# Altium PCB Arduino_FPGA_Shield.PcbDoc (part 2 of 2)
Units mm, origin at the board's own origin, x right, y up, seen from the top; angles counter-clockwise.
Board outline 68.58 x 53.34 mm, 4 copper layers (Top, PWR, GND, Bottom), stack 2.023 mm thick; 82 components, 141 nets, 474 pads, 191 vias.
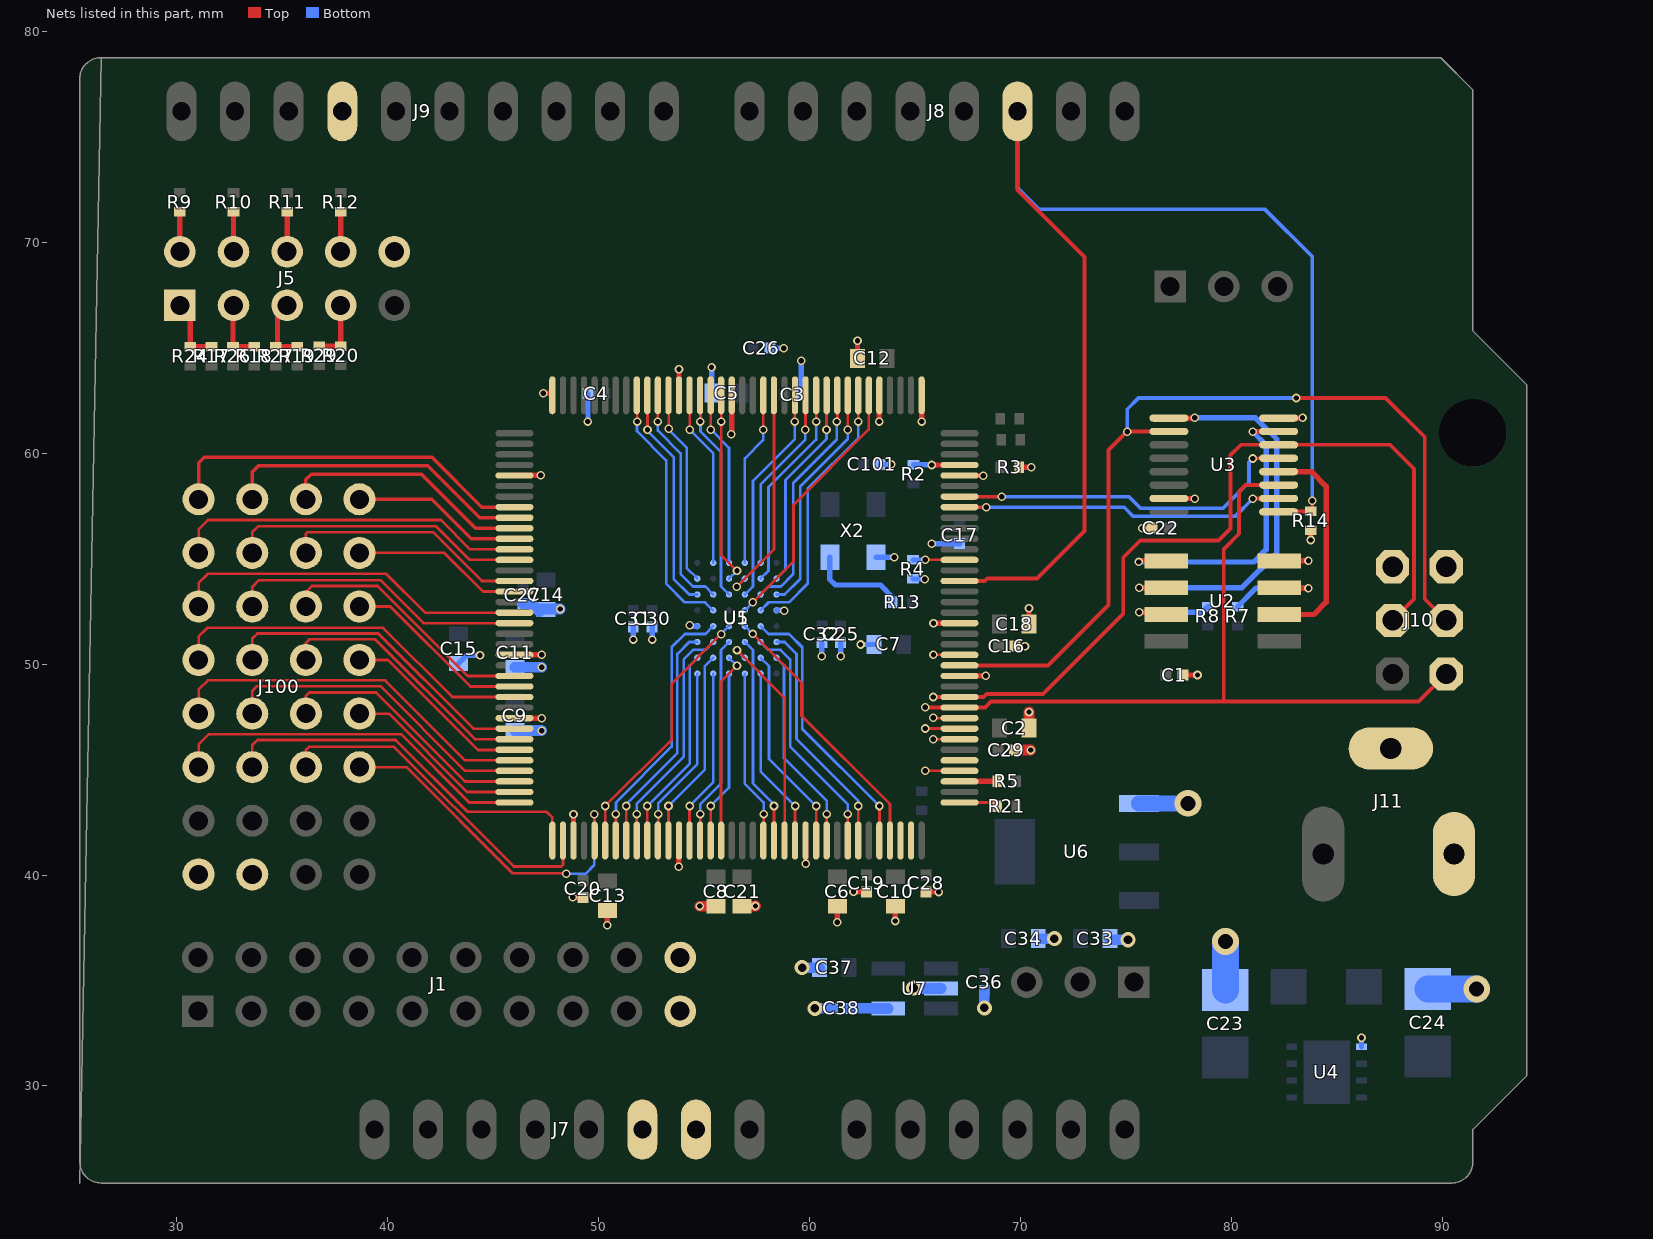
[diagram p4: the nets of this part, all layers, seen from the top]

## Via types
v1: diameter 0.406, hole 0.254, Top to Bottom, 170 vias
v2: diameter 0.405, hole 0.254, Top to Bottom, 8 vias
v3: diameter 0.711, hole 0.406, Top to Bottom, 6 vias
v4: diameter 0.5, hole 0.254, Top to Bottom, 4 vias
v5: diameter 1.27, hole 0.711, Top to Bottom, 3 vias

## Nets (pads, with @x,y where several pads share a name; then routed paths per layer and width w, separated by ;. In a path a pad name is that pad's centre, name@x,y a point inside that pad or via, vN(x,y) a via of type N, cw(c..) or ccw(c..) an arc to the next point about the centre after c; other vN are vias at no path point) (continued)
GND: C1.2 C2.2 C3.1 C4.1 C5.2 C6.2 C7.2 C8.2 C9.2 C10.2 C11.2 C12.2 C13.2 C14.1 C15.2 C16.1 C17.1 C18.1 C19.1 C20.1 C21.1 C22.2 C23.2 C24.2 C25.2 C26.2 C27.2 C28.1 C29.1 C30.2 C31.2 C32.2 C33.2 C34.2 C36.1 C37.1 C38.1 C101.2 J1.19 J1.20 J5.10 J7.6 J7.7 J9.7 J10.6 J11.2 J11.3 J100.29 J100.30 R3.1 R4.1 R14.1 U1.3 U1.13 U1.25 U1.49 U1.54 U1.68 U1.73 U1.77 U1.91 U1.96 U1.108 U1.113 U1.130 U1.136 U2.4 U3.8 U3.15 U4.1 U5.D1 U5.E6 U6.1 U7.2 X2.2 | length 64.7
  Top w0.127: U1.96@53.795,62.747 U1.96@53.797,62.745
  Top w0.254: U1.136@45.728,47.437 U1.136@46.005,47.437 v1@47.36,47.437 ; U1.130@46.005,50.437 46.013,50.444 v1(47.295,50.444) ; U1.113@46.013,58.945 v1(47.256,58.945) ; v1(47.371,62.84) 47.702,62.84 U1.108@47.805,62.737 ; v1(48.768,38.938) 48.755,38.938 48.749,38.945 C20.1@49.251,38.945 ; U1.3@48.805,41.637 v1(48.805,42.88) ; C13.2@50.325,38.35 50.4,38.275 v1(50.4,37.625) v1@50.419,37.644 ; v1(53.8,40.394) 53.8,41.642 U1.13@53.805,41.637 ; U1.96@53.805,62.737 v1(53.805,63.98) ; v1(54.788,38.529) v1@54.799,38.518 ; v1(56.286,60.884) 56.308,60.905 U1.91@56.308,62.734 ; U1.91@56.289,62.731 U1.91@56.295,62.726 ; v1(59.808,40.538) U1.25@59.808,41.639 ; v1(61.304,37.756) 61.316,37.767 C6.2@61.316,38.518 ; v1(62.078,39.205) 62.084,39.199 C19.1@62.814,39.199 ; C12.2@62.267,64.491 v1(62.267,65.318) ; v1(63.305,61.494) U1.77@63.305,62.737 ; v1(64.059,37.821) C10.2@64.059,38.518 ; v1(65.305,61.494) U1.73@65.305,62.737 ; C28.1@65.38,39.199 66.11,39.199 v1(66.116,39.192) ; v1@65.456,54 v1(65.456,54.026) ; v1(65.869,51.937) U1.54@67.105,51.937 ; U1.49@67.105,49.437 v1(68.348,49.437) ; U1.68@67.105,58.937 v1@68.224,58.937 ; C16.1@69.742,50.851 v1(70.206,50.851) ; R3.1@69.944,59.334 v1(70.51,59.334) ; C18.1@70.398,51.892 v1(70.398,52.64) ; v1(75.768,56.439) C22.2@76.232,56.439 ; U3.15@77.029,57.848 78.245,57.848 v1(78.257,57.836) ; C1.2@77.692,49.479 v1(78.384,49.479) ; U3.8@82.229,61.658 83.401,61.658 83.388,61.671 v1(83.363,61.671) ; U2.4@82.253,54.889 v1(83.642,54.889) ; v1(83.744,55.88) R14.1@83.744,56.344
  Top w0.508: v1@54.799,38.518 C8.2@55.55,38.518 ; C21.1@56.794,38.518 57.415,38.518 v1(57.429,38.532) ; C29.1@69.717,45.923 v1(70.476,45.923) ; C2.2@70.398,46.965 v1(70.398,47.724)
  Bottom w0.254: C15.2@43.358,50.024 43.753,50.419 v1(44.374,50.419) ; v1(49.479,61.493) 49.492,61.506 C4.1@49.492,62.823 ; v1(51.643,51.16) C31.2@51.643,51.802 ; v1(52.532,51.16) C30.2@52.532,51.802 ; v1(54.32,51.831) 54.355,51.797 U5.D1@54.677,51.797 ; v1(55.35,64.075) 55.358,64.067 C5.2@55.358,62.84 ; C26.2@58.109,64.973 v1(58.776,64.973) ; U5.E6@58.427,52.547 58.786,52.547 58.791,52.542 58.775,52.527 58.775,52.525 v1(58.8,52.525) ; C3.1@59.607,62.763 v1(59.607,64.383) ; v1(60.579,50.368) C32.2@60.579,51.01 ; v1(61.468,50.368) C25.2@61.468,51.01 ; v1(62.413,50.927) C7.2@63.054,50.927 ; X2.2@63.152,55.062 64.003,55.062 v1(64.008,55.067) ; C101.2@63.341,59.461 v1(63.868,59.461) ; R4.1@64.897,54.033 65.449,54.033 v1(65.456,54.026) ; v1@65.786,55.702 65.792,55.709 C17.1@67.107,55.709 ; v1(83.363,61.671) v1@83.388,61.671 ; v1(83.744,55.88) v1@83.795,55.829 ; U4.1@86.156,31.858 v1(86.157,32.283) v1(86.157,32.283) ; C24.2@89.306,34.595 90.678,34.595
  Bottom w0.508: C9.2@46.025,46.849 v1@47.288,46.849 ; C11.2@46.025,49.846 v1@47.295,49.846 ; C27.2@46.406,52.864 46.817,52.864 C14.1@47.198,52.483 ; C14.1@47.198,52.61 v1(48.184,52.61) ; v3(59.639,35.611) C37.1@60.463,35.611 ; v3(60.249,33.68) C38.1@61.093,33.68 ; v3(64.922,34.646) 64.948,34.62 U7.2@66.223,34.62 ; v3(68.275,33.706) C36.1@68.275,34.525 ; C34.2@70.829,36.982 v3(71.603,36.982) ; C33.2@74.233,36.932 v3(75.089,36.932)
  Bottom w0.762: U6.1@75.619,43.397 v5(77.931,43.397)
  Bottom w1.27: C23.2@79.705,34.544 v5(79.705,36.855) ; C24.2@89.306,34.595 v5(91.618,34.595)
  other v1: 47.295,46.842 47.295,47.437 47.295,49.84 65.786,55.709 68.224,58.928
HARD_TCK: J5.1 R17.1 R24.1 | length 3.2
  Top w0.254: J5.1@30.15,67.005 30.632,66.523 R24.1@30.632,65.042 R17.1@31.648,65.042
HARD_TDI: J5.3 R18.1 R26.1 | length 3.2
  Top w0.254: J5.3@32.918,67.132 32.664,66.878 R26.1@32.664,65.042 R18.1@33.68,65.042
HARD_TDO: J5.5 R19.1 R27.1 | length 3.5
  Top w0.254: J5.5@35.23,67.005 34.773,66.548 34.773,65.111 R27.1@34.696,65.035 R19.1@35.712,65.035 ; J5.5@35.281,66.954 J5.5@35.458,67.132
HARD_TMS: J5.7 R20.1 R29.1 | length 3.3
  Top w0.254: R29.1@36.754,65.06 R20.1@37.77,65.06 J5.7@37.77,66.904 ; J5.7@37.77,67.005 J5.7@37.77,66.904 ; J5.7@37.998,67.132 J5.7@37.77,66.904
HOLD_N: R8.1 U2.7 | length 5.6
  Top w0.254: v1(75.616,52.451) 76.802,52.451 U2.7@76.903,52.349 U2.7@75.997,52.349
  Bottom w0.254: v1(75.616,52.451) 78.595,52.451 R8.1@78.867,52.723
INIT_B: R5.1 U1.39 | length 1.8
  Top w0.254: U1.39@67.105,44.437 67.119,44.45 R5.1@68.892,44.45
IO0: J100.1 U1.116 | length 17.8
  Top w0.17: J100.1@31.039,57.81 31.039,59.538 31.301,59.8 42.1,59.8 44.463,57.437 U1.116@46.005,57.437
IO1: J100.2 U1.117 | length 14.9
  Top w0.17: J100.2@33.579,57.81 33.579,59.106 33.873,59.4 41.9,59.4 44.363,56.937 U1.117@46.005,56.937
IO2: J100.3 U1.118 | length 12
  Top w0.17: J100.3@36.119,57.81 36.119,58.744 36.375,59 41.6,59 44.163,56.437 U1.118@46.005,56.437
IO3: J100.4 U1.119 | length 8.1
  Top w0.17: J100.4@38.659,57.81 42.09,57.81 43.963,55.937 U1.119@46.005,55.937
IO4: J100.5 U1.120 | length 16.8
  Top w0.127: J100.5@31.039,55.27 31.039,56.388 31.476,56.825 42.514,56.825 43.903,55.437 U1.120@46.005,55.437
IO5: J100.6 U1.121 | length 14.2
  Top w0.127: J100.6@33.579,55.27 33.579,56.248 33.855,56.525 42.3,56.525 43.888,54.937 U1.121@46.005,54.937
IO6: J100.7 U1.123 | length 11.8
  Top w0.127: J100.7@36.119,55.27 36.119,56.172 36.197,56.25 42.15,56.25 44.463,53.937 U1.123@46.005,53.937
IO7: J100.8 U1.124 | length 8.1
  Top w0.127: J100.8@38.659,55.27 42.68,55.27 44.513,53.437 U1.124@46.005,53.437
IO8: J100.9 U1.126 | length 17
  Top w0.127: J100.9@31.039,52.73 31.039,53.848 31.471,54.28 39.929,54.28 41.772,52.437 U1.126@46.005,52.437
IO9: J100.10 U1.127 | length 14.3
  Top w0.127: J100.10@33.579,52.73 33.579,53.654 33.9,53.975 39.65,53.975 41.688,51.937 U1.127@46.005,51.937
IO10: J100.11 U1.132 | length 12.5
  Top w0.127: J100.11@36.119,52.73 36.119,53.416 36.403,53.7 39.525,53.7 43.788,49.437 U1.132@46.005,49.437
IO11: J100.12 U1.133 | length 8.9
  Top w0.127: J100.12@38.659,52.73 40.12,52.73 43.913,48.937 U1.133@46.005,48.937
IO12: J100.13 U1.134 | length 17.6
  Top w0.127: J100.13@31.039,50.19 31.039,51.308 31.445,51.714 39.786,51.714 43.063,48.437 U1.134@46.005,48.437
IO13: J100.14 U1.137 | length 15.4
  Top w0.127: J100.14@33.579,50.19 33.579,51.206 33.822,51.45 39.55,51.45 44.063,46.937 U1.137@46.005,46.937
IO14: J100.15 U1.138 | length 12.7
  Top w0.127: J100.15@36.119,50.19 36.119,51.003 36.291,51.175 39.4,51.175 44.138,46.437 U1.138@46.005,46.437
IO15: J100.16 U1.139 | length 9.3
  Top w0.127: J100.16@38.659,50.19 40.01,50.19 44.277,45.923 45.992,45.923 U1.139@46.005,45.937 U1.139@45.778,45.937
IO16: J100.17 U1.140 | length 17.9
  Top w0.127: J100.17@31.039,47.65 31.039,48.793 31.47,49.225 39.875,49.225 43.663,45.437 U1.140@46.005,45.437
IO17: J100.18 U1.141 | length 15.3
  Top w0.127: J100.18@33.579,47.65 33.579,48.73 33.799,48.95 39.65,48.95 43.663,44.937 U1.141@46.005,44.937
IO18: J100.19 U1.142 | length 12.5
  Top w0.127: J100.19@36.119,47.65 36.119,48.489 36.28,48.65 39.45,48.65 43.663,44.437 U1.142@46.005,44.437
IO19: J100.20 U1.143 | length 8.9
  Top w0.127: J100.20@38.659,47.65 40.05,47.65 43.763,43.937 U1.143@46.005,43.937
IO20: J100.21 U1.144 | length 17.6
  Top w0.127: J100.21@31.039,45.11 31.039,46.177 31.537,46.675 40.625,46.675 43.863,43.437 U1.144@46.005,43.437
IO21: J100.22 U1.1 | length 18
  Top w0.127: J100.22@33.579,45.11 33.579,46.152 33.827,46.4 40.375,46.4 43.776,42.999 47.527,42.999 47.805,42.72 U1.1@47.805,41.637
IO22: J100.23 U1.2 | length 16.6
  Top w0.127: J100.23@36.119,45.11 36.119,45.923 36.271,46.075 40.3,46.075 45.975,40.4 48.223,40.4 48.305,40.482 U1.2@48.305,41.637
IO23: J100.24 U1.5 | length 17
  Top w0.127: J100.24@38.659,45.11 40.89,45.11 45.916,40.084 48.435,40.084 v1(48.463,40.056) ; v1(49.784,42.875) 49.784,41.658 U1.5@49.805,41.637
  Bottom w0.127: v1(48.463,40.056) 49.378,40.056 49.784,40.462 v1(49.784,42.875)
IO24: U1.45 | length 1.2
  Top w0.127: v1@65.852,47.426 U1.45@67.095,47.426
  other v1: 65.862,47.453
IO25: U1.44 | length 1.6
  Top w0.127: v1(65.481,46.945) U1.44@67.113,46.945
IO26: U1.43 | length 1.2
  Top w0.127: v1(65.862,46.437) U1.43@67.105,46.437
IO27: U1.41
IO28: U1.40 | length 1.6
  Top w0.127: v1(65.473,44.937) U1.40@67.105,44.937
IO29: U1.34
IO30: U1.35
M0: R2.1 U1.69 | length 2.2
  Top w0.254: v1(65.786,59.436) U1.69@67.105,59.437
  Bottom w0.254: R2.1@64.922,59.454 65.768,59.454 v1(65.786,59.436)
M1: R4.2 U1.60 | length 2.2
  Top w0.127: v1(65.473,54.937) U1.60@67.105,54.937
  Bottom w0.254: R4.2@64.897,54.933 65.47,54.933 v1(65.473,54.937)
MISO_ARD: J10.1 U1.46 U3.3 | length 37.6
  Top w0.178: v1(65.481,47.945) U1.46@67.113,47.945 ; U1.46@67.105,47.937 68.309,47.937 68.597,48.225 88.865,48.225 J10.1@90.17,49.53 ; 79.633,48.25 79.633,55.458 80.35,56.175 80.35,58.176 80.658,58.483 U3.3@82.229,58.483
MISO_FL: U2.2 U3.4 | length 10.5
  Top w0.254: U3.4@82.229,59.118 83.782,59.118 84.48,58.42 84.48,52.934 83.896,52.349 U2.2@82.253,52.349
MISO_FPGA: U1.65 U3.2 | length 15.7
  Top w0.17: U1.65@67.105,57.437 v1(68.366,57.437) ; v1(81.001,57.836) 80.988,57.848 U3.2@82.229,57.848
  Bottom w0.17: v1(68.366,57.437) 68.378,57.425 74.909,57.425 75.336,56.998 80.162,56.998 v1(81.001,57.836)
MOSI_ARD: J10.4 U1.47 U3.6 | length 40
  Top w0.178: v1(65.862,48.437) U1.47@67.105,48.437 68.25,48.437 68.388,48.575 71.056,48.575 74.857,52.375 ; 74.867,52.375 74.867,55.054 75.667,55.855 79.38,55.855 79.95,56.425 79.95,59.909 80.429,60.389 U3.6@82.229,60.389 87.516,60.389 88.646,59.258 88.646,53.086 J10.4@87.63,52.07 J10.4@87.249,51.689
MOSI_FL: U2.5 U3.7 | length 14.7
  Top w0.254: v1(75.59,54.839) 75.641,54.889 U2.5@76.903,54.889 ; v1@80.988,61.023 U3.7@82.229,61.023
  Bottom w0.254: v1(75.59,54.839) 81.051,54.839 81.636,55.423 81.636,60.376 v1(81.001,61.011)
MOSI_FPGA: U1.66 U3.5 | length 16.9
  Top w0.17: U1.66@67.105,57.937 v1(69.109,57.937) ; v1@80.988,59.753 U3.5@82.229,59.753
  Bottom w0.17: v1(69.109,57.937) 75.138,57.937 75.7,57.375 79.575,57.375 80.823,58.623 80.823,59.563 v1(81.001,59.741)
MUX_SEL: J8.3 R14.2 U1.58 U3.1 | length 60.8
  Top w0.178: U1.58@67.105,53.937 68.299,53.937 68.418,54.056 70.781,54.056 73.025,56.3 73.025,69.3 69.85,72.475 J8.3@69.85,76.2 ; U3.1@82.229,57.213 82.242,57.226 R14.2@83.795,57.226 ; R14.2@83.744,57.244 83.776,57.244 83.82,57.288 v1(83.82,57.734)
  Bottom w0.178: J8.3@69.85,76.2 69.85,72.568 70.866,71.552 81.585,71.552 83.82,69.317 v1(83.82,57.734)
NetC38_2: C38.2 U7.4 | length 2.5
  Bottom w0.508: 62.535,33.68 C38.2@61.893,33.68 63.094,33.68 63.083,33.67 U7.4@63.723,33.67
NetR13_2: R13.2 X2.3 | length 4.6
  Bottom w0.254: X2.3@60.952,55.062 60.952,54.008 61.214,53.746 63.348,53.746 63.939,53.155 R13.2@63.939,52.934
PROGRAM_B: R21.1 U1.37 | length 1.8
  Top w0.127: U1.37@67.105,43.437 R21.1@68.892,43.437 ; R21.1@68.809,43.365 R21.1@68.818,43.355
REF_CLK: U1.51 | length 1.6
  Top w0.127: v1(65.867,50.437) U1.51@67.105,50.437 U1.51@67.113,50.444 ; U1.51@66.726,50.394 U1.51@67.105,50.394
RESET_ARD: J10.5
SCLK_ARD: J10.3 U1.50 U3.10 | length 44.1
  Top w0.178: U1.50@67.105,49.937 71.3,49.937 74.168,52.805 74.168,60.147 v1@75.044,61.023 ; v1@75.057,61.023 U3.10@77.029,61.023 ; v1(83.058,62.611) 87.3,62.611 89.154,60.757 89.154,53.086 J10.3@90.17,52.07
  Bottom w0.178: v1(75.057,61.011) 75.057,62.078 75.59,62.611 v1(83.058,62.611)
SCLK_FL: U2.6 U3.9 | length 19.4
  Top w0.254: v1(75.616,53.619) U2.6@76.903,53.619 ; U3.9@77.029,61.658 v1@78.27,61.658
  Bottom w0.254: v1(75.616,53.619) 80.494,53.619 82.144,55.269 82.144,60.655 81.128,61.671 v1(78.257,61.671)
SOFT_TCK: J5.2 R9.1 | length 1.9
  Top w0.254: J5.2@30.15,69.545 R9.1@30.15,71.432
SOFT_TDI: J5.4 R10.1 | length 1.9
  Top w0.254: J5.4@32.69,69.545 R10.1@32.69,71.432
SOFT_TDO: J5.6 R11.1 | length 1.9
  Top w0.254: J5.6@35.23,69.545 R11.1@35.23,71.432
SOFT_TMS: J5.8 R12.1 | length 1.9
  Top w0.254: J5.8@37.77,69.545 R12.1@37.77,71.432
SRAM0_A0: U1.16 U5.A3 | length 8.3
  Top w0.127: U1.16@55.305,41.637 55.308,41.639 v1(55.308,43.271)
  Bottom w0.127: v1(55.308,43.271) 56.177,44.141 U5.A3@56.177,49.547
SRAM0_A1: U1.21 U5.A4 | length 8.3
  Top w0.127: U1.21@57.805,41.637 57.816,41.647 v1(57.816,42.89)
  Bottom w0.127: U5.A4@56.927,49.547 56.927,44.322 57.816,43.433 v1(57.816,42.89)
SRAM0_A2: U1.24 U5.A5 | length 8.6
  Top w0.127: U1.24@59.305,41.637 59.308,41.639 v1(59.308,43.271)
  Bottom w0.127: U5.A5@57.677,49.547 57.677,44.902 v1(59.308,43.271)
SRAM0_A3: U1.17 U5.B3 | length 9.1
  Top w0.127: U1.17@55.805,41.637 55.793,41.649 55.793,49.164 v1(56.555,49.926)
  Bottom w0.127: U5.B3@56.177,50.297 v1@56.548,49.926
SRAM0_A4: U1.23 U5.B4 | length 10.5
  Top w0.127: v1(56.555,50.663) 58.817,48.401 U1.23@58.817,41.649 ; U1.23@58.791,41.651 U1.23@58.805,41.637
  Bottom w0.127: v1(56.555,50.663) U5.B4@56.921,50.297
SRAM0_A5: U1.15 U5.C3 | length 10
  Top w0.127: U1.15@54.805,41.637 54.816,41.647 v1(54.816,42.89)
  Bottom w0.127: v1(54.816,42.89) 54.816,43.361 55.793,44.338 55.793,50.663 U5.C3@56.177,51.047
SRAM0_A6: U1.22 U5.C4 | length 10
  Top w0.127: U1.22@58.305,41.637 58.308,41.639 v1(58.308,43.271)
  Bottom w0.127: U5.C4@56.927,51.047 57.311,50.663 57.311,44.338 58.308,43.341 v1(58.308,43.271)
SRAM0_A7: U1.33 U5.D4 | length 13
  Top w0.127: v1(57.305,51.426) 59.614,49.118 59.614,47.549 63.805,43.357 U1.33@63.805,41.637
  Bottom w0.127: U5.D4@56.927,51.797 v1@57.298,51.426
SRAM0_A8: U1.95 U5.H2 | length 8.4
  Top w0.127: U1.95@54.289,62.742 U1.95@54.295,62.747 ; v1(54.313,61.113) U1.95@54.313,62.745
  Bottom w0.127: v1(54.313,61.113) 55.427,59.999 U5.H2@55.427,54.797
SRAM0_A9: U1.93 U5.H3 | length 8.3
  Top w0.127: U1.93@55.295,62.747 U1.93@55.305,62.737 ; v1(55.313,61.113) U1.93@55.313,62.745
  Bottom w0.127: v1(55.313,61.113) 56.177,60.249 U5.H3@56.177,54.797
SRAM0_A10: U1.88 U5.H4 | length 8.3
  Top w0.127: U1.88@57.795,62.747 57.797,62.745 v1(57.797,61.113)
  Bottom w0.127: U5.H4@56.927,54.797 56.927,59.747 57.797,60.617 v1(57.797,61.113)
SRAM0_A11: U1.84 U5.H5 | length 8.9
  Top w0.127: U1.84@59.795,62.747 59.804,62.738 59.804,61.12 v1(59.797,61.113)
  Bottom w0.127: U5.H5@57.724,54.843 U5.H5@57.677,54.797 57.677,58.516 59.797,60.636 v1(59.797,61.113)
SRAM0_A12: U1.92 U5.G3 | length 9.7
  Top w0.127: U1.92@55.795,62.747 U1.92@55.797,62.745 ; U1.92@55.805,62.737 v1(55.805,61.494) 55.805,55.167 v1(56.555,54.417)
  Bottom w0.127: v1(56.555,54.417) v1@56.548,54.417 ; v1@56.548,54.417 U5.G3@56.177,54.047 v1@56.548,54.417
SRAM0_A13: U1.87 U5.G4 | length 10.3
  Top w0.127: v1@56.555,53.681 58.305,55.431 U1.87@58.305,62.737 U1.87@58.295,62.747
  Bottom w0.127: v1(56.549,53.667) U5.G4@56.927,54.047 U5.G4@56.927,54.047 ; v1@56.555,53.681 v1@56.561,53.681
SRAM0_A14: U1.94 U5.F3 | length 10
  Top w0.127: U1.94@54.795,62.747 U1.94@54.797,62.745 ; v1(54.821,61.494) U1.94@54.821,62.742
  Bottom w0.127: v1(54.821,61.494) 54.821,61.028 55.793,60.056 55.793,53.681 U5.F3@56.177,53.297
SRAM0_A15: U1.85 U5.F4 | length 10.7
  Top w0.127: U1.85@59.289,62.742 v1(59.29,61.493) v1@59.411,61.493
  Bottom w0.127: U5.F4@56.927,53.297 57.311,53.681 57.311,58.683 59.294,60.666 59.294,61.489 v1(59.29,61.493) v1@59.411,61.493
SRAM0_A16: U1.78 U5.E4 | length 12.6
  Top w0.127: v1(57.298,52.925) 59.233,54.859 59.233,57.548 62.797,61.113 62.797,62.745 U1.78@62.795,62.747
  Bottom w0.127: U5.E4@56.927,52.547 v1@57.298,52.917
SRAM0_A17: U1.6 U5.D3 | length 12.6
  Top w0.127: U1.6@50.308,41.639 v1(50.308,43.271) 53.467,46.43 53.467,49.079 v1(55.807,51.419)
  Bottom w0.127: v1@55.807,51.426 U5.D3@56.177,51.797
SRAM0_CS_N: U1.26 U5.B5 | length 9.8
  Top w0.127: U1.26@60.305,41.637 60.308,41.639 v1(60.308,43.271)
  Bottom w0.127: U5.B5@57.677,50.297 58.073,49.901 58.073,45.506 v1(60.308,43.271)
SRAM0_D0: U1.27 U5.B6 | length 9.7
  Top w0.127: U1.27@60.805,41.637 60.816,41.647 v1(60.816,42.89)
  Bottom w0.127: U5.B6@58.427,50.297 58.785,49.939 58.785,45.54 60.816,43.509 v1(60.816,42.89)
SRAM0_D1: U1.29 U5.C5 | length 11.5
  Top w0.127: v1(61.8,42.89) 61.8,41.642 U1.29@61.805,41.637
  Bottom w0.127: U5.C5@57.677,51.047 57.677,51.039 58.042,50.675 58.626,50.675 59.075,50.226 59.075,46.086 61.8,43.361 v1(61.8,42.89)
SRAM0_D2: U1.30 U5.C6 | length 11.2
  Top w0.127: U1.30@62.305,41.637 62.308,41.639 v1(62.308,43.271)
  Bottom w0.127: U5.C6@58.427,51.047 58.813,51.047 59.375,50.485 59.375,46.45 62.308,43.517 v1(62.308,43.271)
SRAM0_D3: U1.32 U5.D5 | length 13.1
  Top w0.127: U1.32@63.305,41.637 63.308,41.639 v1(63.308,43.271)
  Bottom w0.127: U5.D5@57.677,51.797 58.049,51.425 59.019,51.425 59.648,50.796 59.648,46.931 v1(63.308,43.271)
SRAM0_D4: U1.79 U5.E5 | length 12.7
  Top w0.127: U1.79@62.295,62.747 U1.79@62.305,62.737 v1(62.305,61.494)
  Bottom w0.127: U5.E5@57.677,52.547 58.06,52.929 58.967,52.929 58.971,52.925 59.026,52.925 59.908,53.808 59.908,58.308 62.305,60.705 v1(62.305,61.494)
SRAM0_D5: U1.81 U5.F5 | length 11.3
  Top w0.127: v1@61.316,61.483 U1.81@61.316,62.726
  Top w0.254: U1.81@61.289,62.742 U1.81@61.295,62.747
  Bottom w0.127: U5.F5@57.677,53.297 57.677,53.304 58.048,53.675 58.633,53.675 59.222,54.265 59.222,58.587 61.289,60.654 v1(61.289,61.494)
SRAM0_D6: U1.80 U5.F6 | length 11.1
  Top w0.127: U1.80@61.795,62.747 61.797,62.745 v1(61.797,61.113)
  Bottom w0.127: U5.F6@58.427,53.297 58.813,53.297 59.553,54.036 59.553,58.41 61.797,60.654 v1(61.797,61.113)
SRAM0_D7: U1.82 U5.G6 | length 9.7
  Top w0.127: U1.82@60.795,62.747 60.797,62.745 v1(60.797,61.113)
  Bottom w0.127: U5.G6@58.427,54.047 58.852,54.472 58.852,58.725 60.797,60.67 v1(60.797,61.113)
SRAM0_D8: U1.10 U5.B1 | length 9.7
  Top w0.127: U1.10@52.305,41.637 52.308,41.639 v1(52.308,43.271)
  Bottom w0.127: v1@52.301,43.208 v1@52.336,43.243 ; v1(52.308,43.271) 54.32,45.283 54.32,49.939 U5.B1@54.677,50.297
SRAM0_D9: U1.8 U5.C1 | length 11
  Top w0.127: U1.8@51.305,41.637 51.308,41.639 v1(51.308,43.271)
  Bottom w0.127: v1(51.308,43.271) 51.308,43.358 53.725,45.775 53.725,50.48 54.292,51.047 U5.C1@54.677,51.047
SRAM0_D10: U1.9 U5.C2 | length 11.3
  Top w0.127: v1(51.8,42.89) 51.8,41.642 U1.9@51.805,41.637
  Bottom w0.127: v1(51.8,42.89) 51.8,43.375 54.025,45.6 54.025,50.221 54.479,50.675 55.063,50.675 55.427,51.039 U5.C2@55.427,51.047
SRAM0_D11: U1.7 U5.D2 | length 12.6
  Top w0.127: U1.7@50.805,41.637 50.816,41.647 v1(50.816,42.89)
  Bottom w0.127: v1(50.816,42.89) 50.816,43.441 53.457,46.082 53.457,50.796 54.086,51.425 55.055,51.425 U5.D2@55.427,51.797
SRAM0_D12: U1.100 U5.E2 | length 12.3
  Top w0.127: v1(51.821,61.494) U1.100@51.821,62.742
  Bottom w0.127: v1(51.821,61.494) 51.816,61.488 51.816,61.036 53.197,59.656 53.197,53.808 54.079,52.925 55.049,52.925 U5.E2@55.427,52.547
SRAM0_D13: U1.98 U5.F2 | length 10.9
  Top w0.127: v1(52.805,61.494) U1.98@52.805,62.737
  Bottom w0.127: v1(52.805,61.494) 52.805,61.063 53.882,59.986 53.882,54.265 54.472,53.675 55.056,53.675 55.427,53.304 U5.F2@55.427,53.297
SRAM0_D14: U1.99 U5.F1 | length 10.7
  Top w0.127: v1(52.313,61.113) U1.99@52.313,62.745
  Bottom w0.127: v1(52.313,61.113) 52.313,61.043 53.552,59.804 53.552,54.036 54.292,53.297 U5.F1@54.677,53.297
SRAM0_D15: U1.97 U5.G1 | length 9.4
  Top w0.127: U1.97@53.295,62.747 U1.97@53.305,62.737 ; U1.97@53.313,62.745 53.313,61.113 53.325,61.124 v1(53.325,61.15)
  Bottom w0.127: v1(53.325,61.15) 53.325,61.124 53.313,61.113 54.168,60.258 54.168,54.556 U5.G1@54.677,54.047
SRAM0_HBE_N: U1.12 U5.B2 | length 9.5
  Top w0.127: U1.12@53.305,41.637 53.308,41.639 v1(53.308,43.271)
  Bottom w0.127: v1(53.308,43.271) 55.031,44.995 55.031,49.901 U5.B2@55.427,50.297
SRAM0_LBE_N: U1.11 U5.A1 | length 8.7
  Top w0.127: U1.11@52.805,41.637 52.816,41.647 v1(52.816,42.89)
  Bottom w0.127: v1(52.816,42.89) 52.816,43.391 54.677,45.252 U5.A1@54.677,49.547
SRAM0_OE_N: U1.14 U5.A2 | length 8.4
  Top w0.127: U1.14@54.305,41.637 54.308,41.639 v1(54.308,43.271)
  Bottom w0.127: v1(54.308,43.271) 55.427,44.391 U5.A2@55.427,49.547
SRAM0_WE_N: U1.83 U5.G5 | length 9.8
  Top w0.127: U1.83@60.295,62.747 U1.83@60.305,62.737 v1(60.305,61.494)
  Bottom w0.127: U5.G5@57.677,54.047 58.052,54.422 58.052,58.383 60.305,60.636 v1(60.305,61.494)
WP_N: R7.1 U2.3 | length 5.1
  Top w0.254: U2.3@82.253,53.619 82.279,53.594 v1(83.642,53.594)
  Bottom w0.254: R7.1@80.289,52.723 81.16,53.594 v1(83.642,53.594)
pads on no net: J1.3 J1.4 J1.5 J1.6 J1.7 J1.8 J1.9 J1.10 J1.11 J1.12 J1.13 J1.14 J1.15 J1.16 J1.17 J1.18 J7.1 J7.4 J7.8 J9.9 J9.10 J10.2 U1.72 U1.131 U4.3 U4.4 U4.5 U5.A6 U5.E3 U5.G2 U5.H1 U5.H6 X2.1

## Polygon pours and split planes (outlines as drawn)
3V3 on PWR (split plane): 26.41,78.23 26.416,78.23 89.705,78.23 90.93,77.005 90.93,65.786 90.939,65.686 90.968,65.591 91.016,65.502 91.079,65.425 93.47,63.035 93.47,30.691 91.079,28.301 91.016,28.224 90.968,28.135 90.939,28.04 90.93,27.94 90.93,26.416 90.93,26.41 90.931,26.398 90.922,26.307 90.894,26.214 90.848,26.128 90.787,26.053 90.712,25.992 90.626,25.946 90.533,25.918 90.455,25.91 90.449,25.91 77.47,25.91 77.47,31.852 59.639,31.852 59.639,25.91 26.416,25.91 26.404,25.909 26.317,25.918 26.222,25.947 26.134,25.994 26.057,26.057 25.994,26.134 25.947,26.222 25.918,26.317 25.909,26.404 25.91,26.416 25.91,77.749 25.91,77.755 25.918,77.833 25.946,77.926 25.992,78.012 26.053,78.087 26.128,78.148 26.214,78.194 26.307,78.222 26.398,78.231
GND on GND (split plane): 26.41,78.23 26.416,78.23 89.705,78.23 90.93,77.005 90.93,65.786 90.939,65.686 90.968,65.591 91.016,65.502 91.079,65.425 93.47,63.035 93.47,30.691 91.079,28.301 91.016,28.224 90.968,28.135 90.939,28.04 90.93,27.94 90.93,26.416 90.93,26.41 90.931,26.398 90.922,26.307 90.894,26.214 90.848,26.128 90.787,26.053 90.712,25.992 90.626,25.946 90.533,25.918 90.455,25.91 90.449,25.91 77.47,25.91 77.47,31.852 59.639,31.852 59.639,25.91 26.416,25.91 26.404,25.909 26.317,25.918 26.222,25.947 26.134,25.994 26.057,26.057 25.994,26.134 25.947,26.222 25.918,26.317 25.909,26.404 25.91,26.416 25.91,77.749 25.91,77.755 25.918,77.833 25.946,77.926 25.992,78.012 26.053,78.087 26.128,78.148 26.214,78.194 26.307,78.222 26.398,78.231

## Keep-outs
Keep-Out Layer:
  lines w0.254: 25.4,26.416 ccw(c26.416,26.416) 26.416,25.4 90.449,25.4 ccw(c90.437,26.403) 91.44,26.416 91.44,27.94 93.98,30.48 93.98,63.246 91.44,65.786 91.44,77.216 89.916,78.74 26.416,78.74 ccw(c26.403,77.737) 25.4,77.749 25.4,26.416
  text ".Layer_Name" at 25.4,22.86 h0.71

## Other copper
Top:
  text ".Layer_Name" at 25.4,22.86 h0.71
Bottom:
  region net 5V0_REG: 82.474,32.004 83.083,32.004 83.083,30.124 82.474,30.124
  region net EXT_PWR: 86.665,31.191 87.147,31.674 88.316,31.674 88.316,30.455 87.122,30.455 86.665,30.912
  text ".Layer_Name" at 25.4,22.86 h0.71
GND (plane layer: these items are gaps in the copper):
  rectangle: 59.639,25.4 77.47,31.852
  text ".Layer_Name" at 25.4,22.86 h0.71
PWR (plane layer: these items are gaps in the copper):
  rectangle: 59.639,25.4 77.47,31.852
  text ".Layer_Name" at 25.4,22.86 h0.71

## Silkscreen, mask and mechanical layers (free items; w line width, h text height)
Top Overlay:
  drawing of 54 lines, arcs and shapes, not listed
  text "1" at 72.705,73.702 h1.21 r90
  text "3" at 67.757,73.674 h1.21 r90
  text "2" at 70.297,73.674 h1.21 r90
  text "9" at 50.993,73.654 h1.21 r90
  text "7" at 57.597,73.658 h1.21 r90
  text "6" at 60.137,73.655 h1.21 r90
  text "5" at 62.677,73.671 h1.21 r90
  text "8" at 53.533,73.644 h1.21 r90
  text "0" at 75.377,73.633 h1.21 r90
  text "4" at 65.217,73.616 h1.21 r90
  text "13" at 40.833,73.207 h1.21 r90
  text "12" at 43.373,73.203 h1.21 r90
  text "11" at 45.913,73.2 h1.21 r90
  text "10" at 48.453,73.181 h1.21 r90
  text "*" at 51.054,73.152 h0.95 r90
  text "*" at 60.198,73.152 h0.95 r90
  text "*" at 62.738,73.152 h0.95 r90
  text "*" at 67.818,73.152 h0.95 r90
  text "*" at 45.974,72.644 h0.95 r90
  text "*" at 48.514,72.644 h0.95 r90
  text "GND" at 38.318,72.256 h1.21 r90
  text "AREF" at 35.676,72.05 h1.21 r90
  text "(*PWM)" at 57.531,71.501 h0.95
  text "DIGITAL" at 52.578,71.374 h1.68
  text "TX" at 72.644,69.85 h1.21 r90
  text "RX" at 75.438,69.85 h1.21 r90
  text "bank1" at 54.858,59.702 h0.71
  text "bank2" at 64.07,53.884 h0.71 r270
  text "bank0" at 49.04,50.49 h0.71 r90
  text "bank3" at 58.252,44.672 h0.71 r180
  text "POWER" at 50.419,31.242 h1.42
  text "ANALOG IN" at 66,31.2 h1.42
  text "A0" at 61.824,29.743 h0.86
  text "A1" at 64.364,29.743 h0.86
  text "A2" at 66.904,29.743 h0.86
  text "A3" at 69.444,29.743 h0.86
  text "A4" at 71.984,29.743 h0.86
  text "A5" at 74.524,29.743 h0.86
  text "IOREF" at 40.64,29.718 h1.21
  text "RESET" at 43.307,29.718 h1.21
  text "3V3" at 46.228,29.718 h1.21
  text "5V" at 49.022,29.718 h1.21
  text "GND" at 52.451,29.718 h1.21
  text "VIN" at 56.388,29.591 h1.21
  text ".Layer_Name" at 25.4,22.86 h0.71
Bottom Overlay:
  text ".Layer_Name" at 25.4,22.86 h0.71
Bottom Paste:
  text ".Layer_Name" at 25.4,22.86 h0.71
Drill Guide:
  text ".Layer_Name" at 25.4,22.86 h0.71
Dimension:
  lines w0.254: 25.4,26.416 ccw(c26.416,26.416) 26.416,25.4 90.449,25.4 ccw(c90.437,26.403) 91.44,26.416 91.44,27.94 93.98,30.48 93.98,63.246 91.44,65.786 91.44,77.216 89.916,78.74 26.416,78.74 ccw(c26.403,77.737) 25.4,77.749 25.4,26.416
  text ".Layer_Name" at 25.4,22.86 h0.71
tNames:
  text ".Layer_Name" at 25.4,22.86 h0.71
bGlue:
  text ".Layer_Name" at 25.4,22.86 h0.71
Document:
  text ".Layer_Name" at 25.4,22.86 h0.71
ReferenceLS:
  text ".Layer_Name" at 25.4,22.86 h0.71
tDocu:
  text ".Layer_Name" at 25.4,22.86 h0.71
Drill Drawing:
  drawing of 436 lines, arcs and shapes, not listed
  text "Layer" at 125.984,165.916 h1.52
  text "Name" at 132.616,165.916 h1.52
  text "Material" at 145.203,165.916 h1.52
  text "Thickness" at 156.541,165.916 h1.52
  text "Constant" at 165.899,165.916 h1.52
  text "Board Layer Stack" at 174.579,165.916 h1.52
  text "1" at 125.984,162.868 h1.52
  text "Top Paste" at 132.616,162.868 h1.52
  text "2" at 125.984,159.82 h1.52
  text "Top Overlay" at 132.616,159.82 h1.52
  text "3" at 125.984,156.772 h1.52
  text "Top Solder" at 132.616,156.772 h1.52
  text "Solder Resist" at 145.203,156.772 h1.52
  text "0.40mil" at 156.541,156.772 h1.52
  text "3.5" at 165.899,156.772 h1.52
  text "4" at 125.984,153.724 h1.52
  text "Top" at 132.616,153.724 h1.52
  text "Copper" at 145.203,153.724 h1.52
  text "1.38mil" at 156.541,153.724 h1.52
  text "5" at 125.984,150.676 h1.52
  text "Dielectric 1" at 132.616,150.676 h1.52
  text "FR-4" at 145.203,150.676 h1.52
  text "59.05mil" at 156.541,150.676 h1.52
  text "4.8" at 165.899,150.676 h1.52
  text "6" at 125.984,147.628 h1.52
  text "PWR" at 132.616,147.628 h1.52
  text "Copper" at 145.203,147.628 h1.52
  text "1.42mil" at 156.541,147.628 h1.52
  text "7" at 125.984,144.58 h1.52
  text "Dielectric 4" at 132.616,144.58 h1.52
  text "5.00mil" at 156.541,144.58 h1.52
  text "4.2" at 165.899,144.58 h1.52
  text "8" at 125.984,141.532 h1.52
  text "GND" at 132.616,141.532 h1.52
  text "Copper" at 145.203,141.532 h1.52
  text "1.42mil" at 156.541,141.532 h1.52
  text "9" at 125.984,138.484 h1.52
  text "Dielectric 2" at 132.616,138.484 h1.52
  text "10.00mil" at 156.541,138.484 h1.52
  text "4.2" at 165.899,138.484 h1.52
  text "10" at 125.984,135.436 h1.52
  text "Bottom" at 132.616,135.436 h1.52
  text "Copper" at 145.203,135.436 h1.52
  text "1.38mil" at 156.541,135.436 h1.52
  text "11" at 125.984,132.388 h1.52
  text "Bottom Solder" at 132.616,132.388 h1.52
  text "Solder Resist" at 145.203,132.388 h1.52
  text "0.40mil" at 156.541,132.388 h1.52
  text "3.5" at 165.899,132.388 h1.52
  text "12" at 125.984,129.34 h1.52
  text "Bottom Overlay" at 132.616,129.34 h1.52
  text "13" at 125.984,126.292 h1.52
  text "Bottom Paste" at 132.616,126.292 h1.52
  text "Symbol" at 126.574,69.318 h1.83
  text "Hit Count" at 134.369,69.318 h1.83
  text "Finished Hole Size" at 143.57,69.318 h1.83
  text "Plated" at 159.541,69.318 h1.83
  text "Hole Type" at 166.462,69.318 h1.83
  text "Physical Length" at 176.248,69.318 h1.83
  text "Rout Path Length" at 191.464,69.318 h1.83
  text "1" at 134.369,65.529 h1.52
  text "39.37mil (1.000mm)" at 143.57,65.529 h1.52
  text "PTH" at 159.541,65.529 h1.52
  text "Slot" at 166.462,65.529 h1.52
  text "137.80mil (3.500mm)" at 176.248,65.529 h1.52
  text "98.43mil (2.500mm)" at 191.464,65.529 h1.52
  text "2" at 134.369,61.74 h1.52
  text "39.37mil (1.000mm)" at 143.57,61.74 h1.52
  text "PTH" at 159.541,61.74 h1.52
  text "Slot" at 166.462,61.74 h1.52
  text "118.11mil (3.000mm)" at 176.248,61.74 h1.52
  text "78.74mil (2.000mm)" at 191.464,61.74 h1.52
  text "182" at 134.369,57.95 h1.52
  text "10.00mil (0.254mm)" at 143.57,57.95 h1.52
  text "PTH" at 159.541,57.95 h1.52
  text "Round" at 166.462,57.95 h1.52
  text "6" at 134.369,54.161 h1.52
  text "16.00mil (0.406mm)" at 143.57,54.161 h1.52
  text "PTH" at 159.541,54.161 h1.52
  text "Round" at 166.462,54.161 h1.52
  text "3" at 134.369,50.372 h1.52
  text "28.00mil (0.711mm)" at 143.57,50.372 h1.52
  text "PTH" at 159.541,50.372 h1.52
  text "Round" at 166.462,50.372 h1.52
  text "32" at 134.369,46.583 h1.52
  text "34.00mil (0.864mm)" at 143.57,46.583 h1.52
  text "PTH" at 159.541,46.583 h1.52
  text "Round" at 166.462,46.583 h1.52
  text "36" at 134.369,42.794 h1.52
  text "35.43mil (0.900mm)" at 143.57,42.794 h1.52
  text "PTH" at 159.541,42.794 h1.52
  text "Round" at 166.462,42.794 h1.52
  text "32" at 134.369,39.004 h1.52
  text "35.50mil (0.902mm)" at 143.57,39.004 h1.52
  text "PTH" at 159.541,39.004 h1.52
  text "Round" at 166.462,39.004 h1.52
  text "6" at 134.369,35.215 h1.52
  text "38.00mil (0.965mm)" at 143.57,35.215 h1.52
  text "PTH" at 159.541,35.215 h1.52
  text "Round" at 166.462,35.215 h1.52
  text "1" at 134.369,31.426 h1.52
  text "126.00mil (3.200mm)" at 143.57,31.426 h1.52
  text "PTH" at 159.541,31.426 h1.52
  text "Round" at 166.462,31.426 h1.52
  text "301 Total" at 134.369,27.637 h1.52
  text ".Layer_Name" at 25.4,22.86 h0.71
Unrouted:
  lines w0: 120.244,69.571 120.65,69.469
  text ".Layer_Name" at 25.4,22.86 h0.71
214bmp:
  text "D:/SmartProjects/Snc/a4_bn_logo2.bmp" at 25.4,25.336 h0.02
  text ".Layer_Name" at 25.4,22.86 h0.71

## Text inside footprints (layer, text, board x,y; h text height)
J1: Top Overlay "1" at 29.222,32.357 h0.64; Top Overlay "2" at 29.095,36.675 h0.64
J5: Top Overlay "2" at 28.118,70.053 h0.64; Top Overlay "1" at 28.372,65.862 h0.64
J100: Top Overlay "4" at 40.183,58.318 h0.71; Top Overlay "1" at 29.007,58.318 h0.71